# EAGLE board opamp (EAGLE 5.07)
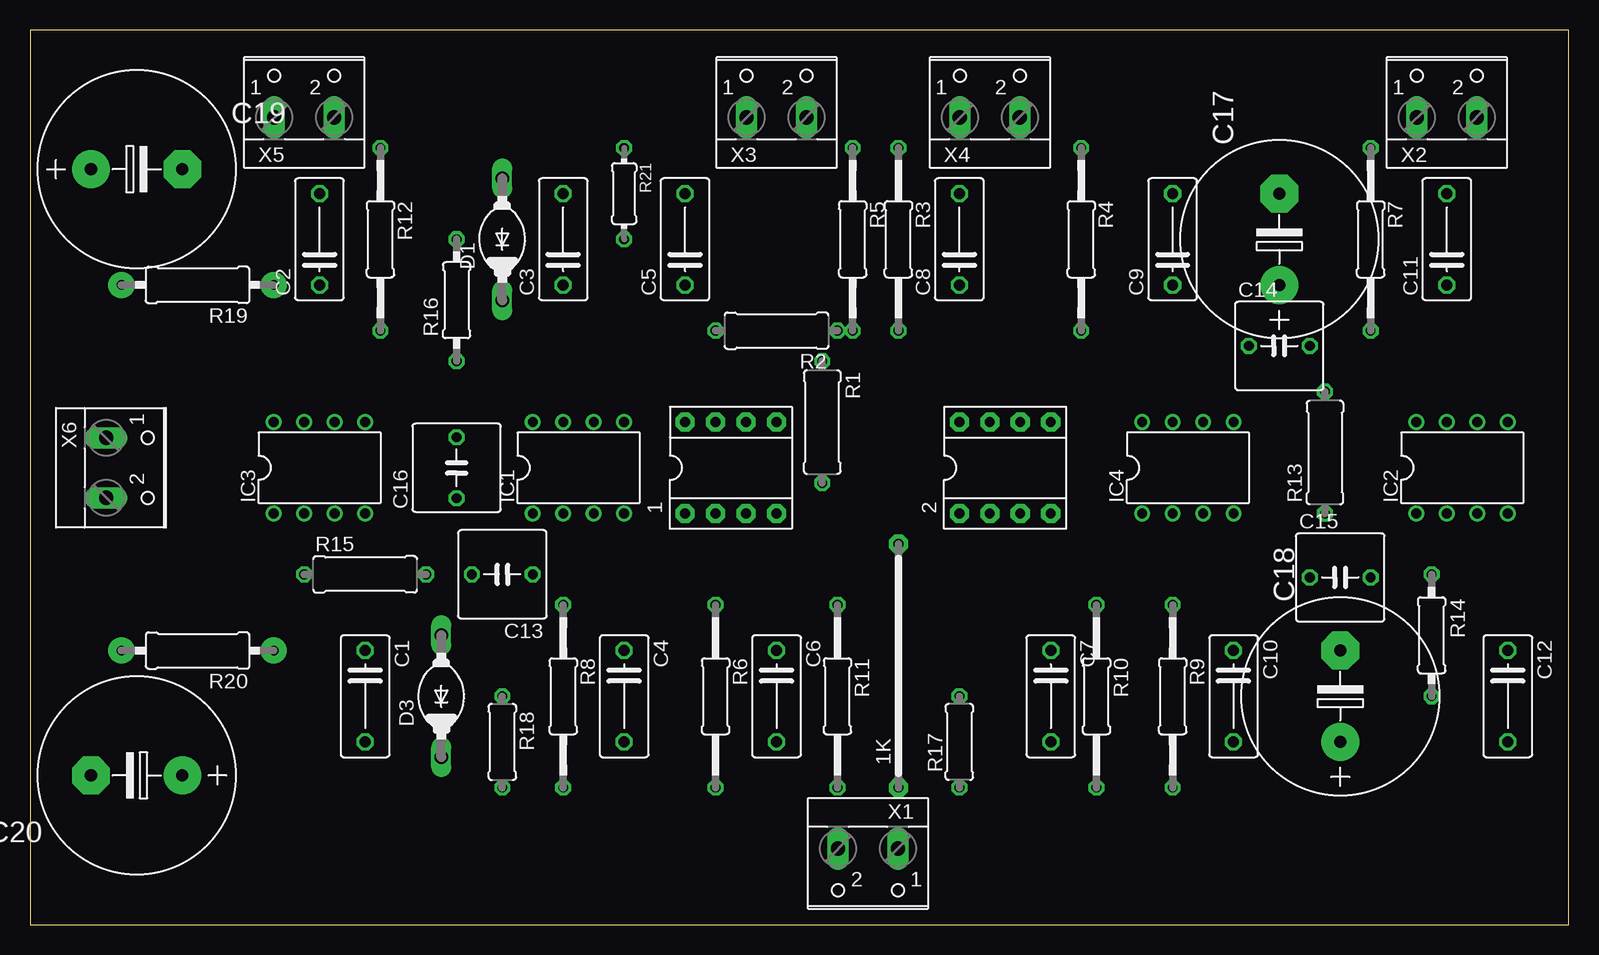
[diagram p0: board, top side]
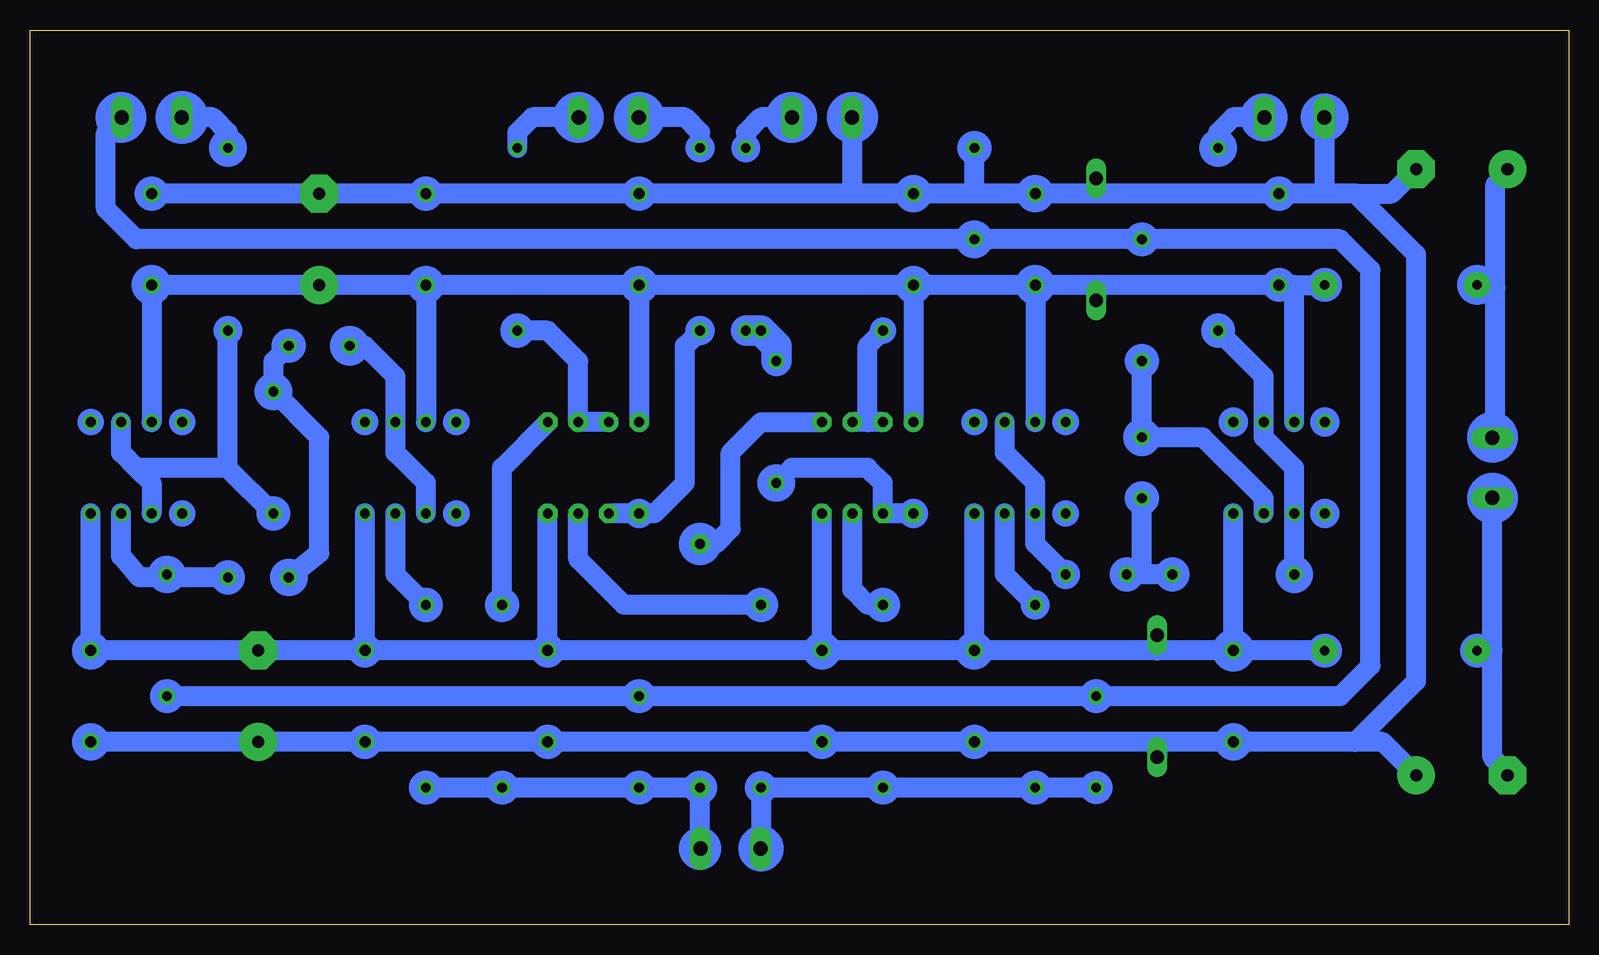
[diagram p1: board, bottom side, seen from below]

Size 128.25 x 74.6 mm. Coordinates in mm from the lower left corner, seen from the top.
Outline: 0,0 128.25,0 128.25,74.6 0,74.6 0,0
Copper layers (1*16): Top 0.035mm / dielectric 1.5mm / Bottom 0.035mm
Design rules "default": minimum track width 10mil, minimum drill 24mil, track to track 8mil, track to pad 8mil, pad to pad 8mil, via to via 8mil, smd to smd 8mil, copper to edge 40mil, drill to drill 8mil, minimum pad ring 10mil, minimum via ring 8mil, stop-mask expansion 4mil, vias tented up to drill 0mil, thermal gap 10mil

## Footprints (pad centres in the part's own frame; a part is rotated, then mirrored left to right if it is on the bottom)
DIP-8 = drill 0.813 pad 1.6 octagon: 1 -3.81,3.81; 2 -3.81,1.27; 3 -3.81,-1.27; 4 -3.81,-3.81; 5 3.81,-3.81; 6 3.81,-1.27; 7 3.81,1.27; 8 3.81,3.81
20 = drill 0.813 pad 1.6 octagon: 1 -10.16,0; 2 10.16,0
C075-042X103 = drill 0.914 octagon: 1 -3.81,0; 2 3.81,0
C050-075X075 = drill 0.813 octagon: 1 -2.54,0; 2 2.54,0
E7,5-16 = drill 1.016 pad 3.15 round: + -3.81,0 | drill 1.016 pad 3.15 octagon: - 3.81,0
DO204-10 = drill 1.118 long: A 5.08,0; C -5.08,0
DIL08 = drill 0.813 pad 1.27 round: 1 -3.81,-3.81; 2 -1.27,-3.81; 3 1.27,-3.81; 4 3.81,-3.81; 5 3.81,3.81; 6 1.27,3.81; 7 -1.27,3.81; 8 -3.81,3.81
0309/10 = drill 0.813 octagon: 1 -5.08,0; 2 5.08,0
0207/15 = drill 0.813 octagon: 1 -7.62,0; 2 7.62,0
0207/10 = drill 0.813 octagon: 1 -5.08,0; 2 5.08,0
0207/7 = drill 0.813 octagon: 1 -3.81,0; 2 3.81,0
0309/12 = drill 0.8 pad 2.184 round: 1 -6.35,0; 2 6.35,0
0204/7 = drill 0.813 octagon: 1 -3.81,0; 2 3.81,0
W237-102 = drill 1.194 long: 1 -2.5,-1.27; 2 2.5,-1.27

## Placement (x,y rotation side)
1  LT1124  [DIP-8]  58.42,38.1 90 top
1K  1K  [20]  72.39,21.59 90 top
2  LT1124  [DIP-8]  81.28,38.1 90 top
C1  68nF  [C075-042X103]  27.94,19.05 270 top
C2  68nF  [C075-042X103]  24.13,57.15 90 top
C3  68nF  [C075-042X103]  44.45,57.15 90 top
C4  68nF  [C075-042X103]  49.53,19.05 270 top
C5  68nF  [C075-042X103]  54.61,57.15 90 top
C6  68nF  [C075-042X103]  62.23,19.05 270 top
C7  68nF  [C075-042X103]  85.09,19.05 270 top
C8  68nF  [C075-042X103]  77.47,57.15 90 top
C9  68nF  [C075-042X103]  95.25,57.15 90 top
C10  68nF  [C075-042X103]  100.33,19.05 270 top
C11  68nF  [C075-042X103]  118.11,57.15 90 top
C12  68nF  [C075-042X103]  123.19,19.05 270 top
C13  100nF  [C050-075X075]  39.37,29.21 180 top
C14  100nF  [C050-075X075]  104.14,48.26 0 top
C15  100nF  [C050-075X075]  109.22,28.96 0 top
C16  100nF  [C050-075X075]  35.56,38.1 90 top
C17  100uF  [E7,5-16]  104.14,57.15 90 top
C18  100uF  [E7,5-16]  109.22,19.05 90 top
C19  2200uF  [E7,5-16]  8.89,62.99 0 top
C20  2200uF  [E7,5-16]  8.89,12.45 180 top
D1  A114  [DO204-10]  39.37,57.15 90 top
D3  A114  [DO204-10]  34.29,19.05 90 top
IC1  LT1128  [DIL08]  45.72,38.1 0 top
IC2  LT1128  [DIL08]  119.38,38.1 0 top
IC3  LT1128  [DIL08]  24.13,38.1 0 top
IC4  LT1128  [DIL08]  96.52,38.1 0 top
R1  100R  [0309/10]  66.04,41.91 270 top
R2  100R  [0309/10]  62.23,49.53 180 top
R3  100R  [0207/15]  72.39,57.15 270 top
R4  100R  [0207/15]  87.63,57.15 270 top
R5  10R  [0207/15]  68.58,57.15 270 top
R6  1K  [0207/15]  57.15,19.05 270 top
R7  100R  [0207/15]  111.76,57.15 270 top
R8  1K  [0207/15]  44.45,19.05 270 top
R9  1K  [0207/15]  95.25,19.05 270 top
R10  1K  [0207/15]  88.9,19.05 270 top
R11  1K  [0207/15]  67.31,19.05 270 top
R12  100R  [0207/15]  29.21,57.15 270 top
R13  18K  [0309/10]  107.95,39.37 90 top
R14  18K  [0207/10]  116.84,24.13 270 top
R15  18K  [0309/10]  27.94,29.21 0 top
R16  18K  [0207/10]  35.56,52.07 90 top
R17  1M  [0207/7]  77.47,15.24 90 top
R18  1M  [0207/7]  39.37,15.24 270 top
R19  0R  [0309/12]  13.97,53.34 180 top
R20  0R  [0309/12]  13.97,22.86 180 top
R21  10R  [0204/7]  49.53,60.96 270 top
X1  [W237-102]  69.85,5.08 180 top
X2  [W237-102]  118.11,68.58 0 top
X3  [W237-102]  62.23,68.58 0 top
X4  [W237-102]  80.01,68.58 0 top
X5  [W237-102]  22.86,68.58 0 top
X6  [W237-102]  7.62,38.1 270 top

## Library data of the parts
1 2 = opamps
1K = jumper
C1-C20 R1-R21 = resistor
D1 D3 = diode
IC1-IC4 = linear
X1-X6 = con-wago-500

## Nets
0V: C1.2 C2.2 C3.2 C4.2 C5.2 C6.2 C7.2 C8.2 C9.2 C10.2 C11.2 C12.2 C17.- C18.+ C19.- C20.+ D1.A D3.C R21.1 X3.1 X5.1
+12V: 1.8 2.8 C2.1 C3.1 C5.1 C8.1 C9.1 C11.1 C17.+ D1.C IC1.7 IC2.7 IC3.7 IC4.7 R19.1
-12V: 1.4 2.4 C1.1 C4.1 C6.1 C7.1 C10.1 C12.1 C18.- D3.A IC1.4 IC2.4 IC3.4 IC4.4 R20.1
AGND: R14.2 R16.2 R17.2 R18.1 R21.2 X2.2
N$1: 2.1 2.2 R3.2
N$2: 1.1 1.2 R1.2
N$3: 1.6 1.7 R2.2
N$4: 2.6 2.7 R4.2
N$5: C13.1 IC1.2 IC1.6
N$6: IC3.2 IC3.6 R12.2 R15.1
N$7: IC2.2 IC2.6 R7.2 R13.1
N$8: C14.1 IC4.2 IC4.6
N$9: R1.1 R2.1 R5.2
N$10: 1.3 R6.1
N$11: 1.5 1K.2
N$12: IC1.3 R8.1
N$13: IC4.3 R9.1
N$14: 1K.1 R9.2 R10.2 R17.1 X1.1
N$15: R6.2 R8.2 R11.2 R18.2 X1.2
N$16: 2.5 R10.1
N$17: 2.3 R11.1
N$18: C14.2 C15.1 R13.2
N$19: C15.2 IC2.3 R14.1
N$20: C13.2 C16.1 R15.2
N$21: C16.2 IC3.3 R16.1
N$22: R5.1 X3.2
N$23: R12.1 X5.2
N$24: C19.+ R19.2 X6.1
N$25: R3.1 X4.1
N$26: R7.1 X2.1
N$27: R4.1 X4.2
N$28: C20.- R20.2 X6.2

## Tracks (layer width: path | path; a pad name or v marks a point on that pad's centre or on a via)
0V
  Bottom 1.676: 39.37,60.96 C3.2 49.53,60.96 | 39.37,60.96 C2.2 20.32,60.96 | 59.69,60.96 C8.2 C9.2 C17.- C11.2 | 59.69,60.96 C5.2 49.53,60.96 | 34.29,15.24 C1.2 17.78,15.24 | 34.29,15.24 C4.2 C6.2 C7.2 C10.2 C18.+ C12.2 | 17.78,60.96 18.8,60.96 20.32,60.96 | 17.78,60.96 12.7,55.88 12.7,20.32 17.78,15.24 | X3.1 59.69,67.27 59.69,60.96 | X5.1 20.32,67.27 20.32,60.96 | 34.29,15.24 D3.C | 39.37,60.96 D1.A | 49.53,60.96 R21.1 | C20.+ 15.49,15.24 17.78,15.24 | C19.- 14.73,60.96 17.78,60.96
+12V
  Bottom 1.676: C3.1 IC1.7 | C5.1 1.8 | C8.1 2.8 | C9.1 IC4.7 | IC2.7 C11.1 C17.+ C9.1 | 39.37,53.34 C2.1 22.86,53.34 | 39.37,53.34 C3.1 | C3.1 C5.1 | C5.1 C8.1 | C8.1 C9.1 | 22.86,53.34 R19.1 | 39.37,53.34 D1.C | IC3.7 22.86,53.34
-12V
  Bottom 1.676: C6.1 1.4 | C1.1 IC3.4 | C1.1 34.29,22.86 | 34.29,22.86 C4.1 | C4.1 IC1.4 | C4.1 C6.1 | IC2.4 C12.1 C18.- C10.1 | C6.1 C7.1 | C7.1 C10.1 | C7.1 2.4 | C10.1 IC4.4 | 34.29,22.86 D3.A | R20.1 C1.1
AGND
  Bottom 1.676: R14.2 R17.2 R18.1 19.05,19.05 16.51,21.59 16.51,54.61 19.05,57.15 R16.2 48.26,57.15 R21.2 119.38,57.15 121.92,59.69 121.92,66 X2.2
N$1
  Bottom 1.676: 2.2 2.1 76.2,34.29 73.66,36.83 73.66,48.26 R3.2
N$2
  Bottom 1.676: 1.1 1.2 57.15,36.83 58.42,38.1 64.77,38.1 R1.2
N$3
  Bottom 1.676: 1.7 58.42,41.91 | 58.42,41.91 1.6 | R2.2 58.42,48.26 58.42,41.91
N$4
  Bottom 1.676: 2.7 2.6 82.55,46.99 85.09,49.53 R4.2
N$5
  Bottom 1.676: IC1.6 46.99,39.37 44.45,36.83 IC1.2 44.45,31.75 C13.1
N$6
  Bottom 1.676: R12.2 25.4,45.72 IC3.6 25.4,40.64 22.86,38.1 IC3.2 R15.1
N$7
  Bottom 1.676: IC2.6 120.65,39.37 119.38,38.1 | 119.38,38.1 118.11,36.83 IC2.2 | 111.76,38.1 R7.2 | 111.76,38.1 119.38,38.1 | R13.1 111.76,38.1
N$8
  Bottom 1.676: IC4.2 95.25,36.83 97.79,39.37 IC4.6 97.79,45.72 100.33,48.26 C14.1
N$9
  Bottom 2.54: R5.2 R2.1 66.04,48.26 R1.1
N$10
  Bottom 1.676: 1.3 59.69,27.94 58.42,26.67 R6.1
N$11
  Bottom 1.676: 1.5 67.31,41.91 69.85,39.37 69.85,33.02 71.12,31.75 1K.2
N$12
  Bottom 1.676: IC1.3 46.99,29.21 R8.1
N$13
  Bottom 1.676: R9.1 97.79,29.21 IC4.3
N$14
  Bottom 1.676: R9.2 R10.2 R17.1 1K.1 72.39,6.39 X1.1
N$15
  Bottom 1.676: R18.2 R8.2 R6.2 R11.2 67.31,6.39 X1.2
N$16
  Bottom 1.676: 2.5 88.9,38.1 R10.1
N$17
  Bottom 1.676: R11.1 78.74,26.67 82.55,30.48 2.3
N$18
  Bottom 1.676: C14.2 107.95,46.99 R13.2 104.14,40.64 104.14,30.99 C15.1
N$19
  Bottom 1.676: C15.2 116.59,28.96 | 116.59,28.96 119.13,28.96 120.65,30.73 IC2.3 | 116.59,28.96 R14.1
N$20
  Bottom 1.676: R15.2 35.56,29.21 | 35.56,29.21 C13.2 | 35.56,29.21 C16.1
N$21
  Bottom 1.676: IC3.3 25.4,35.56 30.48,40.64 C16.2 R16.1
N$22
  Bottom 1.676: X3.2 67.31,67.31 68.58,66.04 R5.1
N$23
  Bottom 1.676: X5.2 27.94,67.31 29.21,66.04 R12.1
N$24
  Bottom 1.676: X6.1 6.1,40.85 6.1,53.09 | 6.1,53.09 6.1,61.72 5.08,62.74 C19.+ | R19.2 7.37,53.09 6.1,53.09
N$25
  Bottom 1.676: X4.1 73.66,67.31 72.39,66.04 R3.1
N$26
  Bottom 1.676: X2.1 113.03,67.31 111.76,66.04 R7.1
N$27
  Bottom 1.676: X4.2 86.36,67.31 87.63,66.04 R4.1
N$28
  Bottom 1.676: 6.35,22.86 6.35,13.97 5.08,12.7 C20.- | 6.35,22.86 X6.2 | 6.35,22.86 R20.2
(copper drawn outside any net)
  shapes: Bottom circle x131